# Altium PCB silnik.PcbDoc
Units mm, origin at the board's own origin, x right, y up, seen from the top; angles counter-clockwise.
Board outline 66 x 33 mm, 2 copper layers (Top Layer, Bottom Layer); 11 components, 9 nets, 33 pads, 3 vias.
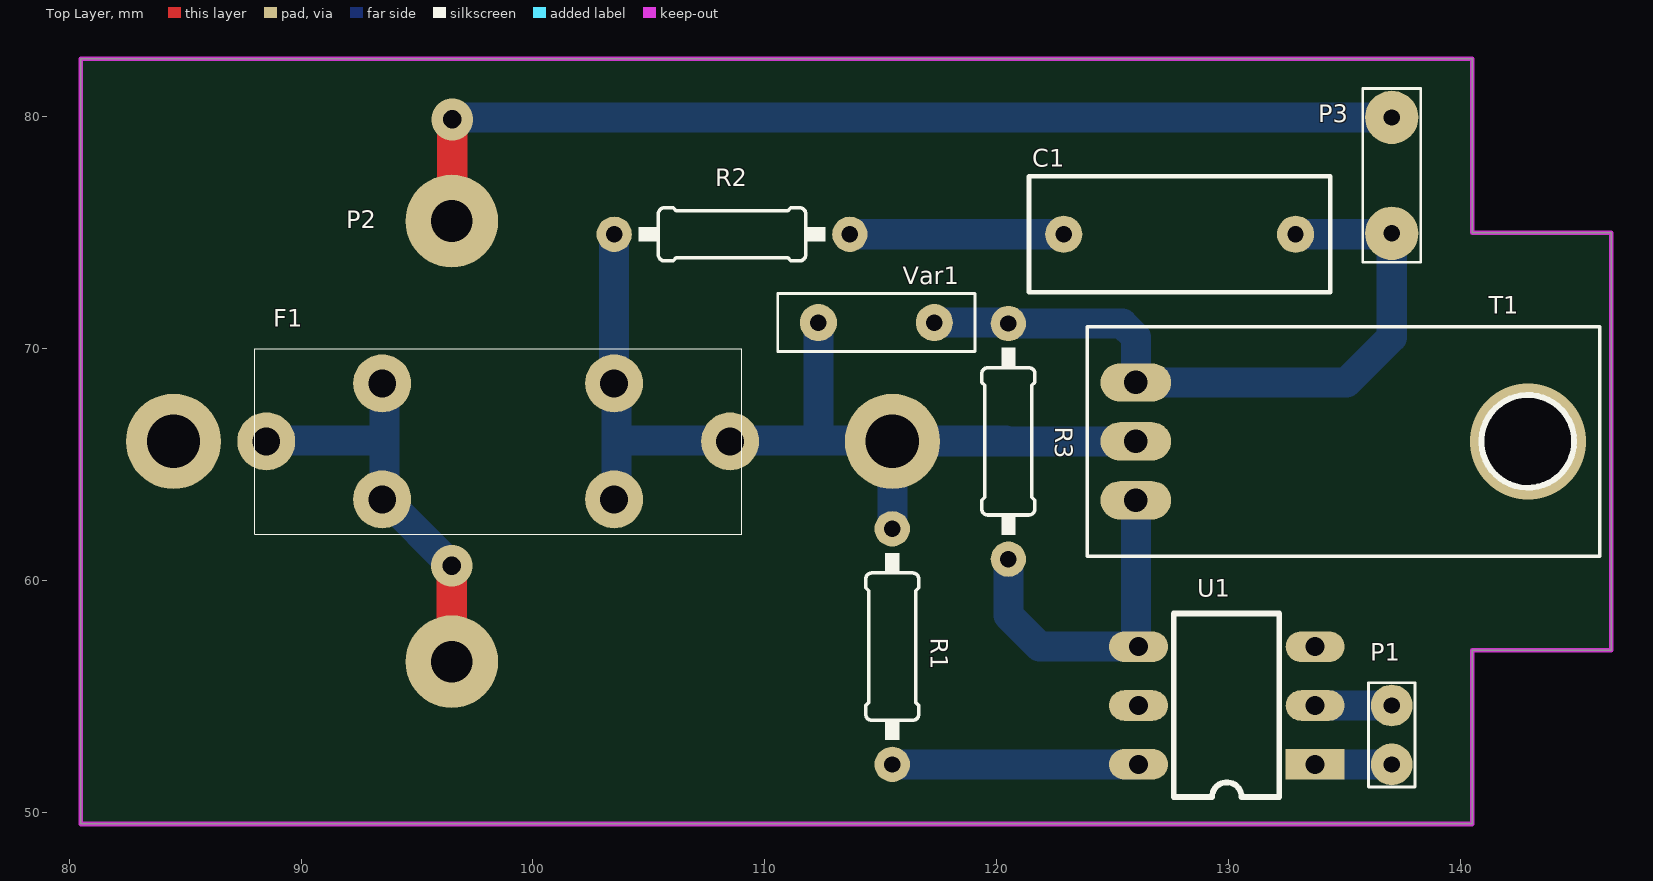
[diagram p0: Top Layer view]
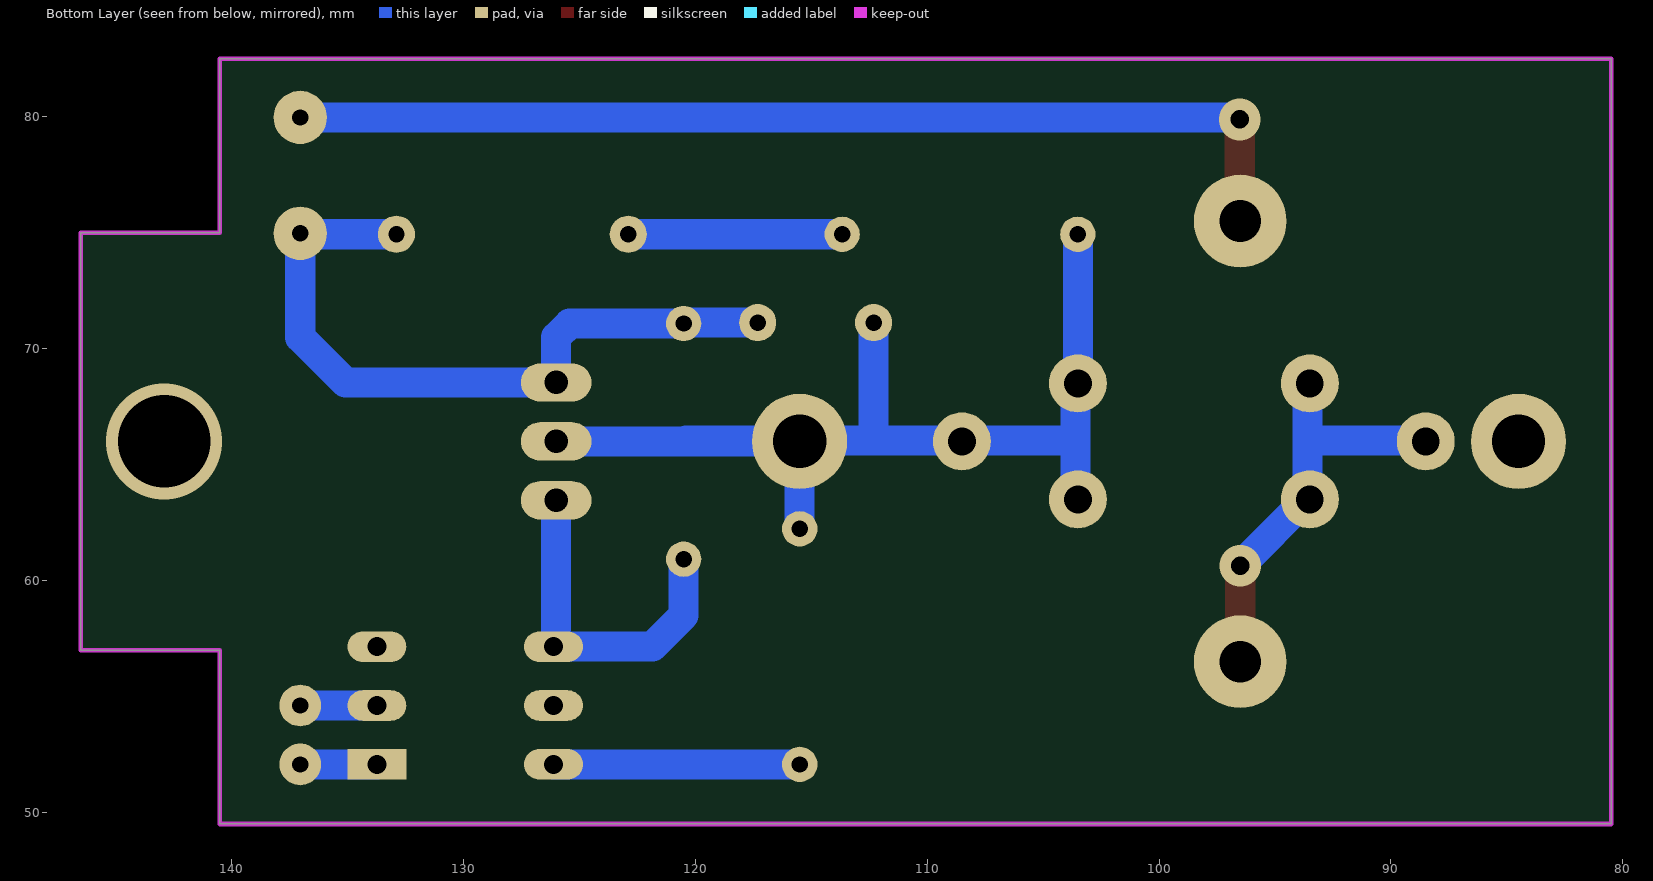
[diagram p1: Bottom Layer view, seen from below]

## Layer stack, top to bottom
Top Layer: signal copper 0.0356
Dielectric: dielectric 0.32, FR-4, Dk 4.8
Bottom Layer: signal copper 0.0356

## Board outline
80.5,49.5 80.5,82.5 140.5,82.5 140.5,75 146.5,75 146.5,57 140.5,57 140.5,49.5

## Design rules (kind name [scope] priority, off if disabled: settings)
Clearance [All] p1: gap=0.254
ComponentClearance [All] p1 off: gap=0.254 collisioncheckmode=3 verticalgap=0.254 showdistances=FALSE
PolygonConnect [All] p1: connectstyle=Relief reliefconductorwidth=0.254 reliefentries=4 polygonreliefangle="90 Angle" airgapwidth=0.254
RoutingVias [All] p1: holewidth=0.711 width=1.27 viastyle="Through Hole" minholewidth=0.711 minwidth=1.27 maxholewidth=0.711 maxwidth=1.27
SolderMaskExpansion [All] p1: expansion=0.102
Width [All] p1: maxlimit=2 minlimit=1 preferedwidth=1 minimp=50.000000 maximp=50.000000 favimp=50.000000
27 further rules are at their usual default settings.

## Classes and differential pairs
component class silnik: C1 F1 P2 P3 R1 R2 R3 T1 U1 Var1

## Components (designator, comment, footprint, x,y, rotation, side; value= is the part's Value field where it differs from the comment)
C1 "10nF" 10nF/310VAC 127.889,74.93 r0 top
F1 "1A" 5x20mm 93.5,66 r180 top
P1 "PAD 2" PAD2_2.54mm 137.033,53.34 r90 top
P2 "PP53N" PP53N 95.5,67 r0 top
P3 "PAD 2" PAD2_5mm 137.033,77.47 r270 top
R1 "360R" RCL_0207/10 115.494,57.15 r90 top
R2 "360R" RCL_0207/10 108.585,74.93 r180 top
R3 "360R" RCL_0207/10 120.5,66 r90 top
T1 "BT136-600E" TO-220-H 126,66 r270 top
U1 "MOC3043X" DIP-6 129.921,55.88 r180 top
Var1 "250VAC" HEL5D391K_5mm_var 114.808,71.12 r0 top

## Footprints (in the part's own frame and the unit in brackets; to place one, negate y for a bottom-side part, rotate by r counter-clockwise, add the part's x,y. Pads: shape width x height; smd on the part's side, far side on the other; paste and mask are expansions set on the pad)
5x20mm [mm]
  round 2.5 hole 1.2: 1(-15,0) 1(-10,-2.5) 1(-10,2.5) 2(0,2.5) 2(0,-2.5) 2(5,0)
  silkscreen extent -15.5,-4 5.5,4, body extent -15.2,-3.71 5.2,3.71, height 11
10nF/310VAC [mm]
  round 1.6 hole 0.7: 1(-5,0) 2(5,0)
  silkscreen extent -6.5,-2.5 6.5,2.5, body extent -6.5,-2.5 6.5,2.5, height 11
DIP-6 [mil]
  rect 100x52 hole 32: 1(-150,150)
  oval 100x52 hole 32: 2(-150,50) 3(-150,-50) 4(150,-50) 5(150,50) 6(150,150)
  silkscreen extent -89,-106 90,207, body extent -157,-109 157,209, height 170
HEL5D391K_5mm_var [mm]
  round 1.6 hole 0.7: 1(-2.5,0) 2(2.5,0)
  silkscreen extent -4.25,-1.25 4.25,1.25, body extent -4,-1.25 4,1.26, height 1.57
PAD2_2.54mm [mm]
  round 1.8 hole 0.7: 1(-1.27,0) 2(1.27,0)
  silkscreen extent -2.25,-1 2.25,1
PAD2_5mm [mm]
  round 2.3 hole 0.7: 1(-2.5,0) 2(2.5,0)
  silkscreen extent -3.75,-1.25 3.75,1.25
PP53N [mm]
  round 4 hole 1.8: 1(1,8.5) 2(1,-10.5)
  round 4.1 hole 2.3: M(-11,-1) M(20,-1)
  Keep-Out Layer lines w0.2: 45,8 45,15.5 -15,15.5 -15,-17.5 45,-17.5 45,-10 51,-10 51,8 45,8 ; 45,8 45,8
RCL_0207/10 [mil]
  round 60 hole 27.56: 1(-200,0) 2(200,0)
  silkscreen extent -159,-45 159,45, body extent -212,-46 212,45, height 116
TO-220-H [mil]
  oval 65x120 hole 40: 1(-100,0) 2(0,0) 3(100,0)
  silkscreen extent -195,-83 195,787, body extent -195,-10 195,785, height 179

## Part data
C1: library part Cap, "Capacitor"
F1: library part FUSE
P1 P3: library part PAD2
P2: "Obudowa: do zasilacza; X:78,5mm; Y:40mm; Z:21mm"
R1 R2 R3: library part Res, "Resistor"
T1: "Triak; 600V; 4A; 11mA"
Var1: library part Varistor, "HEL5D391K"

## Via types
v1: diameter 1.8, hole 0.8, Top Layer to Bottom Layer, 2 vias
v2: diameter 5, hole 4, Top Layer to Bottom Layer, 1 vias

## Nets (pads, with @x,y where several pads share a name; then routed paths per layer and width w, separated by ;. In a path a pad name is that pad's centre, name@x,y a point inside that pad or via, vN(x,y) a via of type N, cw(c..) or ccw(c..) an arc to the next point about the centre after c; other vN are vias at no path point)
NetC1_1: C1.1 R2.1 | length 9.2
  Bottom Layer w1.3: R2.1 C1.1
NetC1_2: C1.2 P3.2 R3.2 T1.1 Var1.2 | length 31.3
  Bottom Layer w1.3: Var1.2 R3.2@120.46,71.12 ; R3.2 125.42,71.08 126,70.5 T1.1 135.088,68.54 137.033,70.485 P3.2 136.993,74.93 C1.2
NetF1_1: F1.1 P2.M@115.5,66 R1.2 R2.2 T1.2 Var1.1 | length 47.6
  Bottom Layer w1.3: F1.1@103.5,68.5 R2.2@103.5,74.925 ; R2.2@103.566,74.925 R2.2@103.566,74.984 ; F1.1@103.599,63.54 103.599,66.04 ; F1.1@103.599,68.54 103.599,66.04 ; 112.308,66.04 Var1.1 ; R1.2@115.5,62.23 115.5,66 T1.2 ; 120.396,66.04 103.599,66.04
NetF1_2: F1.2 P2.2 | length 18.2
  Top Layer w1.3: P2.2 v1(96.5,60.639)
  Bottom Layer w1.3: F1.2@88.599,66.04 93.599,66.04 ; F1.2@93.599,68.54 93.599,66.04 ; v1(96.5,60.639) 93.599,63.54 93.599,66.04
NetP1_1: P1.1 U1.1 | length 3.3
  Bottom Layer w1.3: U1.1 P1.1
NetP1_2: P1.2 U1.2 | length 3.3
  Bottom Layer w1.3: U1.2 P1.2
NetP2_1: P2.1 P3.1 | length 44.9
  Top Layer w1.3: P2.1@96.52,75.52 v1(96.52,79.883)
  Bottom Layer w1.3: v1(96.52,79.883) 96.607,79.97 P3.1
NetR1_1: R1.1 U1.6 | length 10.6
  Bottom Layer w1.3: R1.1 U1.6
NetR3_1: R3.1 T1.3 U1.4 | length 16.6
  Bottom Layer w1.3: R3.1 120.5,58.5 121.85,57.15 126,57.15 T1.3 ; 124.349,57.15 U1.4
pads on no net: P2.M@84.5,66 U1.3 U1.5
copper on no net:
  other v2: 142.9,66

## Keep-outs
Keep-Out Layer:
  the board outline again, w0.2